# Altium PCB BEE-1012 PAY-IF V1.0.0.PcbDoc (part 7 of 7)
Units mm, origin at the board's own origin, x right, y up, seen from the top; angles counter-clockwise.
Board outline 93 x 90 mm, 6 copper layers (Top_1, GND_2, SIGNAL_3, PWR_4, GND_5, Bottom_6), stack 1.606 mm thick; 497 components, 371 nets, 2212 pads, 1215 vias.
Unrouted connection lines stored in the file: 56.
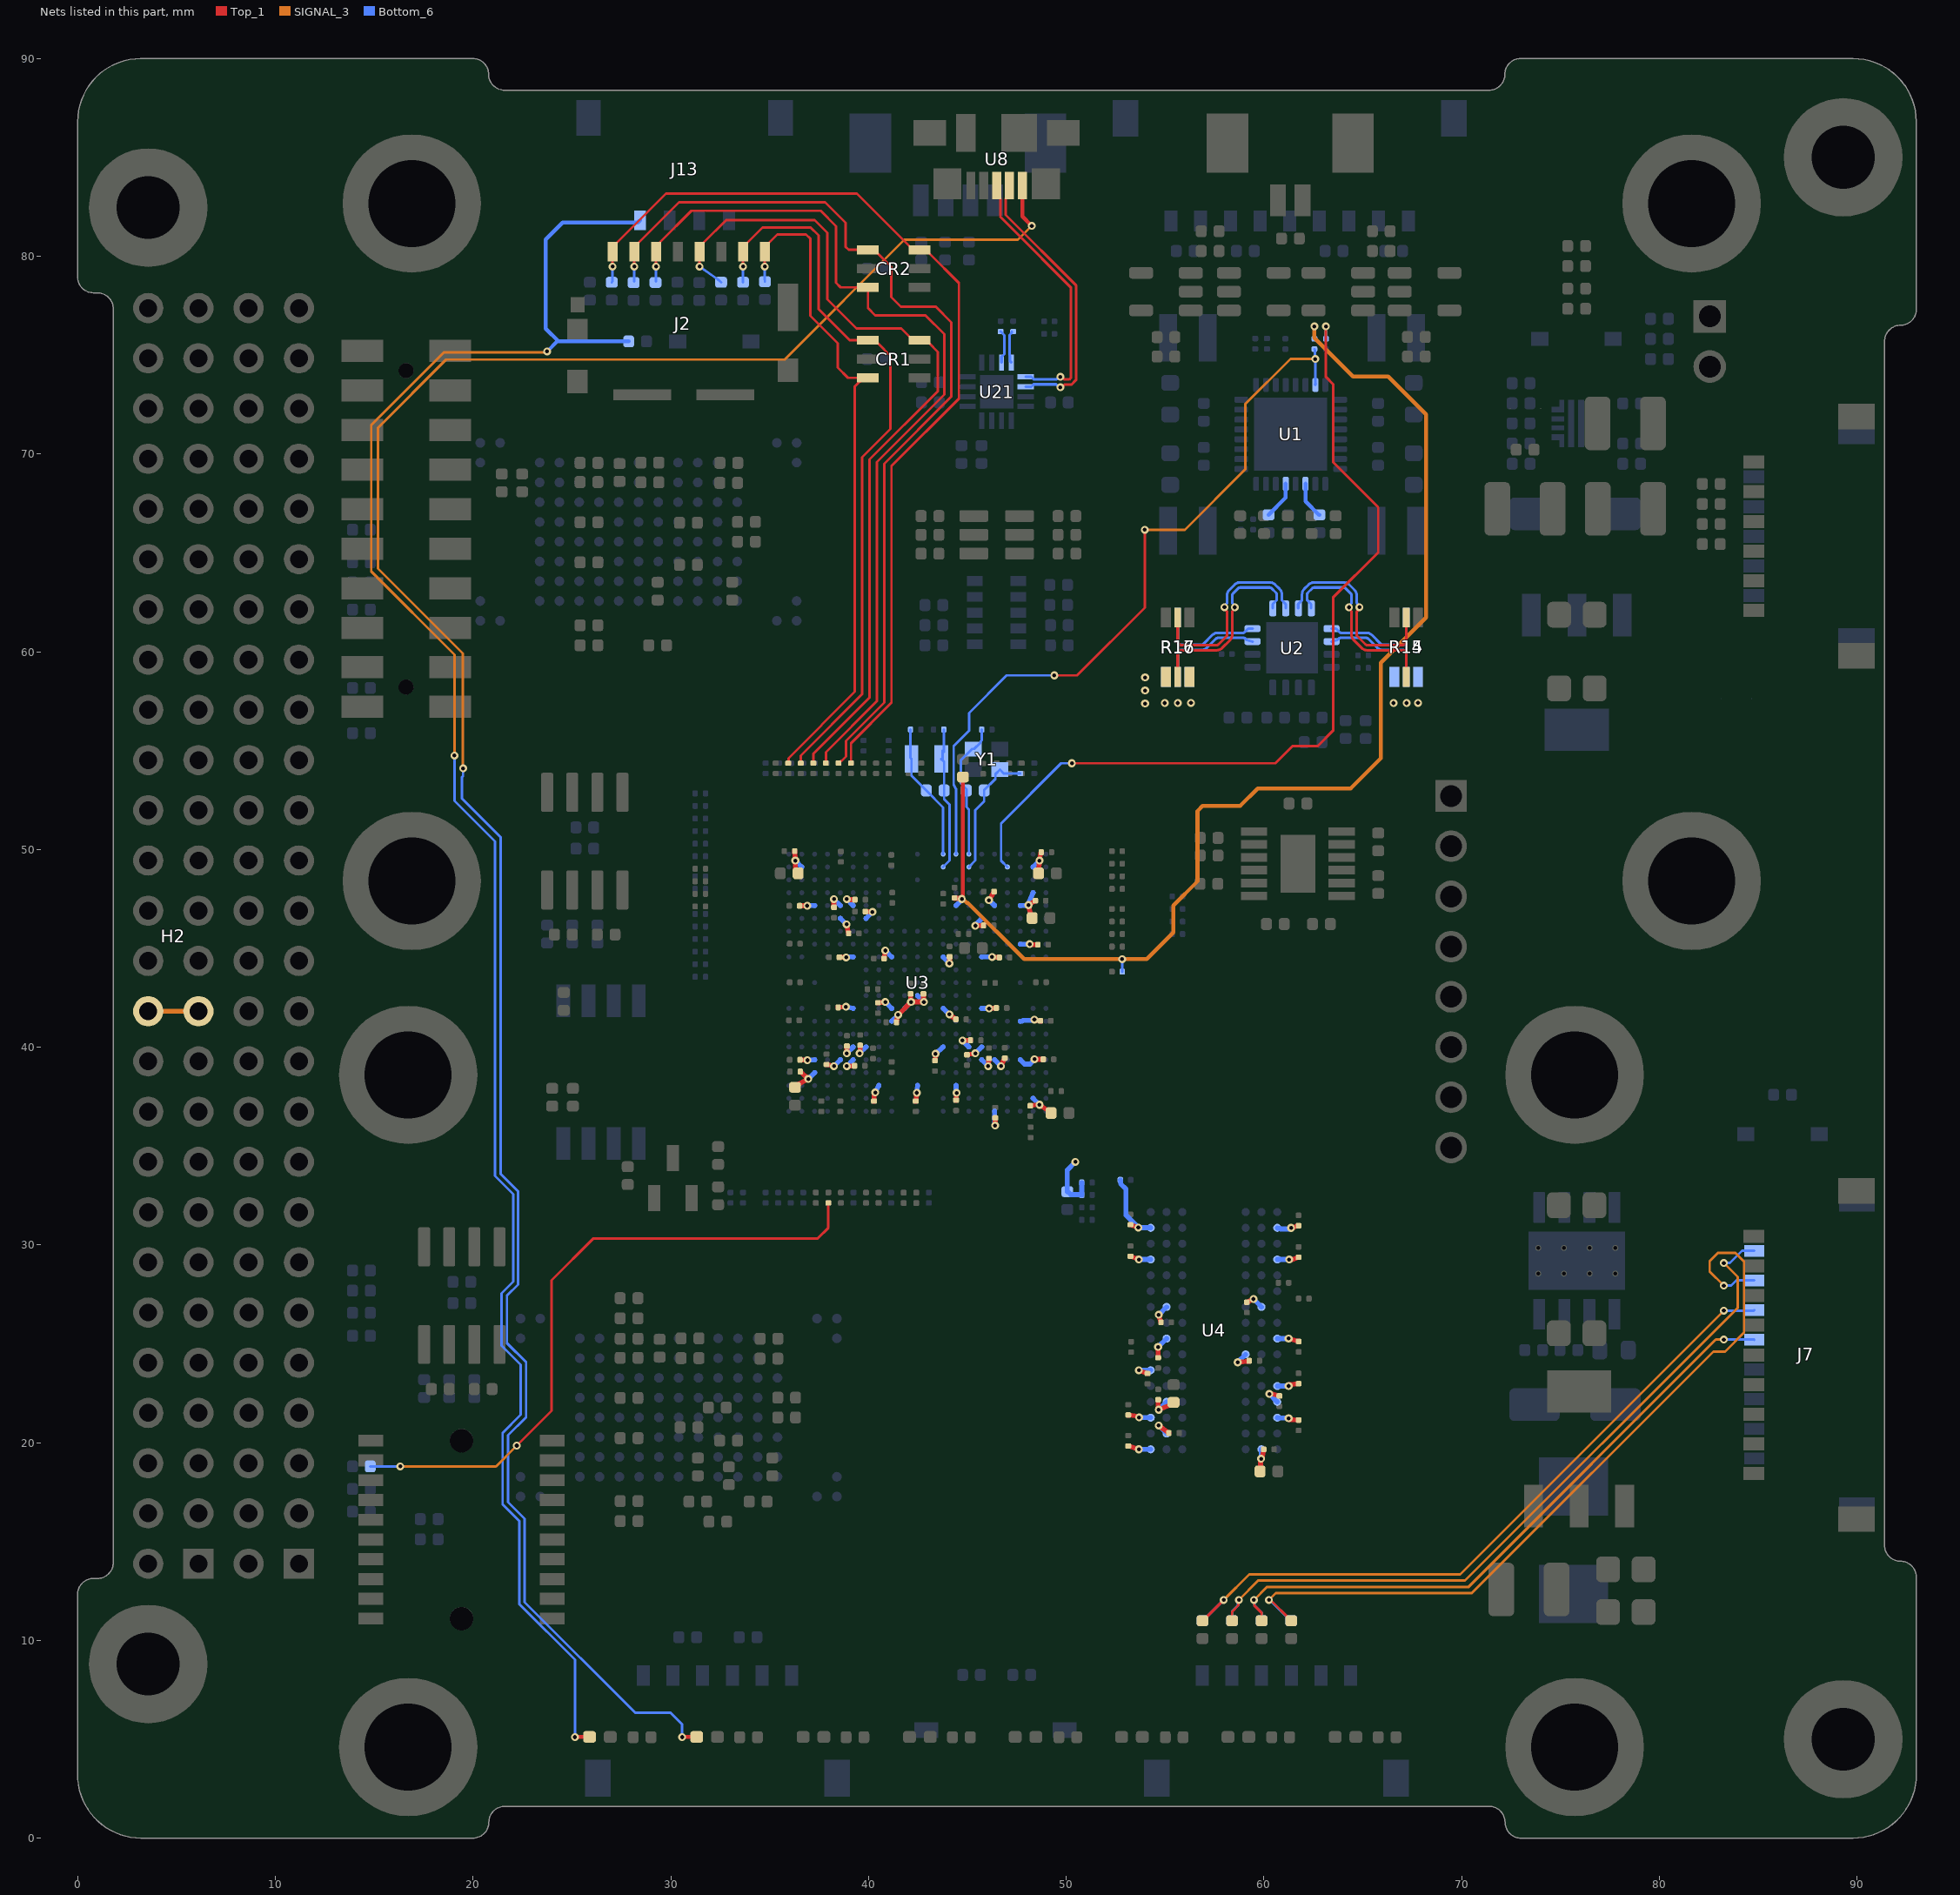
[diagram p10: the nets of this part, all layers, seen from the top]

## Via types
v1: diameter 0.4, hole 0.2, Top_1 to Bottom_6, tented both sides, 1215 vias

## Nets (pads, with @x,y where several pads share a name; then routed paths per layer and width w, separated by ;. In a path a pad name is that pad's centre, name@x,y a point inside that pad or via, vN(x,y) a via of type N, cw(c..) or ccw(c..) an arc to the next point about the centre after c; other vN are vias at no path point) (continued)
SDMMC2_CK: CR1.3 J2.P5 R107.2 R154.1 | length 43.1
  Top_1 w0.125: v1(31.457,79.478) J2.P5@31.457,80.226 31.648,80.417 31.648,80.676 32.801,81.828 37.283,81.828 37.924,81.188 37.924,77.82 39.394,76.35 41.656,76.35 42.253,75.753 CR1.3@42.577,75.753 42.743,75.587 43.084,75.587 43.504,75.167 43.504,73.168 40.055,69.719 40.055,57.683 37.211,54.839 R107.2@37.211,54.364
  Bottom_6 w0.125: v1(31.457,79.478) 32.386,78.819 R154.1@32.549,78.682
SDMMC2_CMD: CR2.6 J2.P3 R106.2 R155.1 | length 46.2
  Top_1 w0.125: v1(29.257,79.478) J2.P3@29.257,80.226 29.448,80.417 29.448,80.701 31.043,82.296 37.592,82.296 38.363,81.525 38.363,78.655 38.593,78.425 CR2.6@39.973,78.425 39.973,77.375 40.341,77.007 42.881,77.007 43.831,76.057 43.831,73 40.426,69.594 40.426,57.502 37.846,54.922 R106.2@37.846,54.364
  Bottom_6 w0.125: R155.1@29.257,78.724 v1(29.257,79.478)
SDMMC2_D0: CR1.4 J2.P7 R108.2 R150.1 | length 37
  Top_1 w0.125: v1(33.657,79.478) J2.P7@33.657,80.226 33.657,80.467 34.647,81.457 37.069,81.457 37.474,81.053 37.474,77.33 39.051,75.753 CR1.4@39.973,75.753 40.139,75.587 40.487,75.587 41.116,74.958 41.116,71.271 39.684,69.839 39.684,57.853 36.576,54.746 R108.2@36.576,54.364
  Bottom_6 w0.125: R150.1@33.655,78.682 33.657,78.819 v1(33.657,79.478)
SDMMC2_D1: CR1.6 J2.P8 R110.2 R151.1 | length 34.3
  Top_1 w0.125: v1(34.757,79.478) J2.P8@34.757,80.226 34.757,80.467 35.392,81.102 36.842,81.102 37.055,80.889 37.055,76.983 38.446,75.592 38.446,74.37 38.963,73.853 CR1.6@39.754,73.853 ; R110.2@35.941,54.364 35.955,54.379 35.955,54.612 39.313,57.97 39.313,73.412 CR1.6@39.754,73.853 ; CR1.6@39.973,73.853 39.884,73.853 CR1.6@39.754,73.853
  Bottom_6 w0.125: v1(34.757,79.478) 34.757,78.848 R151.1@34.762,78.711
SDMMC2_D2: CR2.3 J2.P1 R112.2 R152.1 | length 48.9
  Top_1 w0.125: v1(27.057,79.478) J2.P1@27.057,80.226 27.057,80.467 29.757,83.167 39.411,83.167 42.253,80.325 CR2.3@42.577,80.325 42.901,80.325 43.067,80.159 43.067,80.154 44.571,78.649 44.571,72.793 41.168,69.389 41.168,57.425 39.116,55.373 39.116,55.131 39.119,55.128 39.119,54.367 R112.2@39.116,54.364
  Bottom_6 w0.125: R152.1@27.015,78.682 27.057,78.724 v1(27.057,79.478)
SDMMC2_D3: CR2.4 J2.P2 R76.2 R153.1 | length 47.5
  Top_1 w0.125: v1(28.157,79.478) J2.P2@28.157,80.226 28.157,80.467 28.348,80.658 30.424,82.734 37.808,82.734 38.849,81.693 38.849,80.476 39,80.325 CR2.4@39.973,80.325 40.297,80.325 40.463,80.159 41.148,79.474 41.148,77.937 41.643,77.443 43.408,77.443 44.196,76.654 44.196,72.905 40.797,69.506 40.797,57.422 39.133,55.758 38.866,55.491 38.866,55.027 38.869,55.025 38.869,54.703 38.642,54.476 38.609,54.476 38.497,54.364 R76.2@38.481,54.364
  Bottom_6 w0.125: R153.1@28.157,78.724 v1(28.157,79.478)
SENSE1_N: R14.4 U2.12 | length 9.9
  Top_1 w0.134: v1(64.306,62.244) 64.42,62.056 cw(c64.305,61.986) 64.439,61.987 ; 64.439,61.987 cw(c64.305,61.986) 64.439,61.985 64.435,61.662 ccw(c64.696,61.658) 64.435,61.658 64.435,60.865 ccw(c64.83,60.865) 64.55,60.586 64.947,60.189 ccw(c65.226,60.469) 65.226,60.074 67.049,60.074 cw(c67.049,59.94) 67.143,60.035 67.159,60.02 cw(c67.064,59.925) 67.198,59.925 R14.4@67.198,58.724
  Bottom_6 w0.134: U2.12@62.387,62.192 62.387,62.409 62.192,62.603 62.192,62.896 cw(c62.326,62.896) 62.232,62.991 62.447,63.207 cw(c62.542,63.112) 62.542,63.246 64.038,63.246 cw(c64.038,63.112) 64.133,63.207 64.396,62.944 cw(c64.301,62.849) 64.435,62.849 ccw(c64.696,62.849) 64.435,62.847 64.437,62.504 ; v1(64.306,62.244) 64.418,62.434 ccw(c64.303,62.502) 64.437,62.503
SENSE1_P: R14.3 U2.11 | length 10.3
  Top_1 w0.134: 64.696,61.658 64.696,60.865 ccw(c64.83,60.865) 64.735,60.77 65.131,60.374 ccw(c65.226,60.469) 65.226,60.335 67.011,60.335 ccw(c67.011,60.469) 67.105,60.374 67.159,60.428 ccw(c67.064,60.522) 67.198,60.522 R14.3@67.198,61.724 ; 64.696,61.658 64.7,61.981 ccw(c64.305,61.986) 64.7,61.987 ccw(c64.439,61.987) 64.7,61.988 cw(c64.835,61.989) 64.719,62.057 v1(64.831,62.247)
  Bottom_6 w0.134: U2.11@61.737,62.192 61.737,62.409 61.931,62.603 61.931,62.896 cw(c62.326,62.896) 62.047,63.176 62.264,63.393 cw(c62.542,63.112) 62.542,63.507 64.038,63.507 cw(c64.038,63.112) 64.317,63.392 64.581,63.128 cw(c64.301,62.849) 64.696,62.849 64.698,62.504 ccw(c64.832,62.505) 64.717,62.436 v1(64.831,62.247)
SENSE2_N: R15.4 U2.14 | length 5.4
  Bottom_6 w0.134: U2.14@63.427,60.517 63.731,60.604 63.784,60.656 cw(c63.878,60.562) 63.878,60.696 65.182,60.696 cw(c65.182,60.562) 65.277,60.657 65.736,60.198 ccw(c66.014,60.478) 66.014,60.083 67.079,60.083 cw(c67.079,59.949) 67.213,59.949 R15.4@67.213,58.724
SENSE2_P: R15.3 U2.13 | length 5.4
  Bottom_6 w0.134: U2.13@63.427,61.167 63.644,61.167 63.815,60.996 ccw(c63.909,61.091) 63.909,60.957 65.182,60.957 cw(c65.182,60.562) 65.461,60.842 65.92,60.383 ccw(c66.014,60.478) 66.014,60.344 67.079,60.344 ccw(c67.079,60.478) 67.213,60.478 R15.3@67.213,61.724
SENSE3_N: R16.4 U2.7 | length 5.4
  Bottom_6 w0.134: R16.4@55.641,58.724 55.641,59.949 cw(c55.775,59.949) 55.775,60.083 56.839,60.083 ccw(c56.839,60.478) 57.117,60.198 57.577,60.657 cw(c57.671,60.562) 57.671,60.696 58.975,60.696 cw(c58.975,60.562) 59.07,60.656 59.122,60.604 U2.7@59.427,60.517
SENSE3_P: R16.3 U2.8 | length 5.4
  Bottom_6 w0.134: R16.3@55.641,61.724 55.641,60.478 ccw(c55.775,60.478) 55.775,60.344 56.839,60.344 ccw(c56.839,60.478) 56.933,60.383 57.392,60.842 cw(c57.671,60.562) 57.671,60.957 58.944,60.957 ccw(c58.944,61.091) 59.039,60.996 59.21,61.167 U2.8@59.427,61.167
SENSE4_N: R17.4 U2.9 | length 9.9
  Top_1 w0.134: R17.4@55.641,58.724 55.641,59.925 cw(c55.775,59.925) 55.68,60.02 55.695,60.035 cw(c55.79,59.94) 55.79,60.074 57.613,60.074 ccw(c57.613,60.469) 57.891,60.189 58.289,60.586 ccw(c58.008,60.865) 58.403,60.865 58.403,61.658 ccw(c58.142,61.658) 58.403,61.662 58.399,61.985 cw(c58.533,61.986) 58.399,61.987 ; 58.399,61.987 cw(c58.533,61.986) 58.418,62.056 v1(58.532,62.244)
  Bottom_6 w0.134: 58.402,62.503 ccw(c58.536,62.502) 58.42,62.434 v1(58.532,62.244) ; 58.402,62.504 58.403,62.847 ccw(c58.142,62.849) 58.403,62.849 cw(c58.538,62.849) 58.442,62.944 58.706,63.207 cw(c58.8,63.112) 58.8,63.246 60.296,63.246 cw(c60.296,63.112) 60.391,63.207 60.607,62.991 cw(c60.512,62.896) 60.646,62.896 60.646,62.603 60.452,62.409 U2.9@60.452,62.192
SENSE4_P: R17.3 U2.10 | length 10.3
  Top_1 w0.134: R17.3@55.641,61.724 55.641,60.522 ccw(c55.775,60.522) 55.68,60.428 55.733,60.374 ccw(c55.827,60.469) 55.827,60.335 57.613,60.335 ccw(c57.613,60.469) 57.707,60.374 58.103,60.77 ccw(c58.008,60.865) 58.142,60.865 58.142,61.658 ; v1(58.007,62.247) 58.119,62.057 cw(c58.004,61.989) 58.138,61.988 ccw(c58.399,61.987) 58.138,61.987 ccw(c58.533,61.986) 58.138,61.981 58.142,61.658
  Bottom_6 w0.134: v1(58.007,62.247) 58.121,62.436 ccw(c58.006,62.505) 58.14,62.504 58.142,62.849 cw(c58.538,62.849) 58.257,63.128 58.522,63.392 cw(c58.8,63.112) 58.8,63.507 60.296,63.507 cw(c60.296,63.112) 60.574,63.393 60.791,63.176 cw(c60.512,62.896) 60.907,62.896 60.907,62.603 61.102,62.409 U2.10@61.102,62.192
SHDN: R3.1 U3.B4 | length 44.2
  Top_1 w0.127: v1(50.292,54.356) 60.579,54.356 61.442,55.219 62.712,55.219 63.5,56.007 63.5,62.738 65.786,65.024 65.786,67.31 63.5,69.596 63.5,73.533 63.141,73.892 v1(63.141,76.454)
  Bottom_6 w0.125: U3.B4@47.028,49.112 46.708,49.432 46.708,51.315 49.748,54.356 v1(50.292,54.356)
  Bottom_6 w0.127: R3.1@63.141,75.827 v1(63.141,76.454)
SPI_CLK_EXP: J7.4 R221.1 R240.1 | length 33.2
  Top_1 w0.127: v1(59.496,12.044) 59.513,12.028 59.513,11.763 59.889,11.387 R221.1@59.889,10.991
  SIGNAL_3 w0.127: v1(59.496,12.044) 60.142,12.69 60.716,12.69 70.337,12.69 82.86,25.213 v1(83.264,25.213)
  Bottom_6 w0.125: v1@59.468,12.064 59.519,12.013 59.519,11.772 59.889,11.402 R240.1@59.889,10.991 ; v1(83.264,25.213) 84.797,25.213 J7.4@84.809,25.201
SPI_CS_EXP: J7.2 R220.1 R239.1 | length 41.6
  Top_1 w0.127: v1@60.259,12.083 60.294,12.083 R220.1@61.386,10.991
  SIGNAL_3 w0.127: v1@60.259,12.083 60.299,12.083 60.6,12.383 70.514,12.383 82.736,24.605 83.325,24.605 84.288,25.568 84.288,29.155 83.851,29.591 82.968,29.591 82.55,29.173 82.55,28.654 v1(83.264,27.94)
  Bottom_6 w0.125: v1@60.259,12.083 61.351,10.991 R239.1@61.386,10.991 ; v1(83.264,27.94) 83.636,27.94 83.903,28.207 J7.2@84.803,28.207
  other v1: 60.259,12.044
SPI_MISO_EXP: J7.3 R223.1 R243.1 | length 35.9
  Top_1 w0.127: R223.1@56.896,10.991 56.917,10.991 v1(57.971,12.044) v1@57.971,12.05
  SIGNAL_3 w0.127: v1@57.971,12.05 59.257,13.335 69.929,13.335 v1(83.264,26.67)
  Bottom_6 w0.125: R243.1@56.896,10.991 56.917,10.991 v1(57.971,12.044) v1@57.971,12.05 ; v1(83.264,26.67) 84.778,26.67 J7.3@84.809,26.701
SPI_MOSI_EXP: J7.1 R222.1 R242.1 | length 38.1
  Top_1 w0.125: R222.1@58.393,10.991 58.393,11.447 58.713,11.768 58.713,12.023 v1(58.734,12.044)
  SIGNAL_3 w0.127: v1(58.734,12.044) 59.714,13.024 70.174,13.024 83.962,26.812 83.962,28.385 v1(83.264,29.083)
  Bottom_6 w0.125: R242.1@58.393,10.991 58.393,11.471 58.681,11.76 58.681,11.992 v1(58.734,12.044) ; v1(83.264,29.083) 83.568,29.083 84.186,29.701 J7.1@84.809,29.701
STX_12V: H2.23 H2.24 | length 2.5
  SIGNAL_3 w0.25: H2.24@3.57,41.82 H2.23@6.11,41.82
STX_GPIO: R55.2 R215.2 | length 33.3
  Top_1 w0.134: v1(22.211,19.848) 23.967,21.605 23.967,28.206 26.09,30.328 37.437,30.328 37.973,30.864 R55.2@37.973,32.123
  SIGNAL_3 w0.134: v1(16.319,18.796) 21.159,18.796 v1(22.211,19.848)
  Bottom_6 w0.134: R215.2@14.801,18.796 v1(16.319,18.796)
SW_2_CONN_USB_N: R114.1 U21.11 | length 1.7
  Bottom_6 w0.134: R114.1@46.685,76.192 46.697,76.192 46.767,76.121 46.767,76.11 46.873,76.004 46.873,75.048 46.732,74.907 U21.11@46.732,74.622
SW_2_CONN_USB_P: R115.1 U21.12 | length 1.7
  Bottom_6 w0.134: U21.12@47.232,74.622 47.169,74.685 47.169,74.97 47.134,75.005 47.134,76.019 47.236,76.121 47.244,76.129 R115.1@47.244,76.192
USB_DEBUG_N: U8.2 U21.14 | length 14.2
  Top_1 w0.134: U8.2@47.132,83.577 47.132,83.119 46.938,82.925 46.938,82.094 50.496,78.536 50.496,73.734 50.265,73.503 49.908,73.503 49.781,73.376 v1(49.709,73.376)
  Bottom_6 w0.134: U21.14@47.952,73.402 48.237,73.402 48.356,73.521 49.493,73.521 49.638,73.376 v1(49.709,73.376)
USB_DEBUG_P: U8.3 U21.13 | length 13.8
  Top_1 w0.134: U8.3@46.482,83.577 46.482,83.119 46.676,82.925 46.676,81.986 47.313,81.349 50.235,78.427 50.235,73.843 50.157,73.764 49.919,73.764 49.781,73.901 v1(49.709,73.901)
  Bottom_6 w0.134: U21.13@47.952,73.902 48.237,73.902 48.356,73.783 49.519,73.783 49.638,73.901 v1(49.709,73.901)
VBUS: D1.2 U8.1 | length 115.2
  Top_1 w0.2: v1(30.572,5.109) 30.575,5.112 31.308,5.112 D1.2@31.311,5.115 ; U8.1@47.782,83.577 47.782,82.012 v1(48.26,81.534)
  SIGNAL_3 w0.125: v1(19.496,54.103) 19.477,54.121 19.477,59.911 15.189,64.2 15.189,71.323 18.638,74.772 35.758,74.772 41.814,80.829 47.555,80.829 v1(48.26,81.534)
  Bottom_6 w0.125: v1(19.496,54.103) v1(19.496,54.103) 19.494,53.715 19.431,53.653 19.431,52.578 21.394,50.615 21.394,33.589 22.278,32.705 22.278,27.993 21.717,27.432 21.717,25.032 22.683,24.066 22.683,21.286 21.775,20.378 21.775,16.985 22.612,16.147 22.612,11.935 28.206,6.341 29.987,6.341 30.572,5.756 v1(30.572,5.109)
VBUS/EN: D12.2 J13.1 R232.1 | length 98
  Top_1 w0.2: v1(25.152,5.109) 25.155,5.112 25.888,5.112 D12.2@25.891,5.116
  SIGNAL_3 w0.125: v1(19.058,54.75) 19.058,59.848 14.848,64.058 14.848,71.464 18.528,75.144 v1@23.749,75.144
  Bottom_6 w0.125: v1(19.058,54.75) 19.058,52.451 21.105,50.404 21.105,33.485 22.028,32.562 22.028,28.137 21.439,27.547 21.439,24.916 22.409,23.946 22.409,21.406 21.496,20.493 21.496,16.879 22.343,16.032 22.343,11.829 25.152,9.021 v1(25.152,5.109)
  Bottom_6 w0.2: v1(23.749,75.184) 24.257,75.692 24.323,75.692 ; R232.1@27.871,75.692 24.323,75.692 ; J13.1@28.446,81.814 28.344,81.712 24.536,81.712 23.678,80.853 23.678,76.338 24.323,75.692
VDDBU: C59.2 R6.2 R21.2 R28.2 U3.E8 | length 64.1
  Top_1 w0.134: v1@44.704,47.517 v1(44.726,47.495)
  Top_1 w0.2: R28.2@44.704,53.652 44.778,53.578 44.778,47.601 44.726,47.549 v1(44.726,47.495)
  Top_1 w0.25: C59.2@44.33,47.543 44.349,47.523 44.698,47.523 v1@44.704,47.517
  SIGNAL_3 w0.2: v1(44.726,47.495) 44.781,47.495 44.981,47.294 45.026,47.294 47.87,44.45 49.628,44.45 v1(52.832,44.45) 54.075,44.45 55.419,45.794 55.419,47.164 56.642,48.387 56.642,51.943 56.896,52.197 58.801,52.197 59.69,53.086 64.389,53.086 65.913,54.61 65.913,59.436 68.199,61.722 68.199,72.009 66.294,73.914 64.516,73.914 62.556,75.874 v1(62.556,76.454)
  Bottom_6 w0.125: v1(52.832,44.45) 52.836,44.446 52.836,43.819 R21.2@52.84,43.815
  Bottom_6 w0.127: R6.2@62.556,75.827 v1(62.556,76.454)
  Bottom_6 w0.25: U3.E8@44.428,47.162 44.726,47.46 v1(44.726,47.495)
VDDCORE: C24.2 C25.2 C26.2 C27.2 C28.2 C30.2 C31.2 C32.2 C33.2 C34.2 C35.2 C36.2 C37.2 C38.2 C39.2 C40.2 R16.2 U3.B2 U3.F6 U3.F15 U3.H3 U3.J9 U3.J13 U3.J16 U3.N13 U3.N16 U3.T15 U3.U16 U3.U17 U3.U19 U3.V19 | length 13.2
  Top_1 w0.25: C40.2@36.288,37.968 36.311,38.043 v1(36.953,38.387) C28.2@36.562,38.767 ; C32.2@36.54,39.362 36.549,39.352 36.899,39.352 v1(36.909,39.343) ; C37.2@37.884,39.116 38.236,39.061 v1(38.253,39.037) ; C27.2@38.468,42.008 v1(38.862,42.042) ; C25.2@38.527,44.548 v1@38.861,44.548 ; v1(38.903,39.037) 38.917,39.051 39.286,39.051 C31.2@39.293,39.058 ; v1(39.553,39.687) 39.579,39.713 39.579,40.094 C30.2@39.581,40.095 ; C36.2@39.85,46.851 v1@40.189,46.851 ; C26.2@40.494,42.236 v1@40.848,42.291 ; C33.2@40.791,44.482 v1(40.853,44.887) ; v1(44.092,44.235) 44.099,44.242 44.099,44.563 C39.2@44.103,44.567 ; v1(45.403,46.139) 45.412,46.149 45.809,46.149 C38.2@45.818,46.158 ; v1(48.153,45.212) 48.194,45.212 48.223,45.183 C35.2@48.568,45.183 ; C24.2@48.581,48.783 48.581,48.786 48.578,48.789 v1(48.653,49.437) C34.2@48.716,49.837
  Bottom_6 w0.25: v1(36.909,39.343) U3.U19@37.278,39.362 ; v1(36.953,38.387) U3.V19@37.278,38.712 ; v1(38.253,39.037) U3.U17@38.578,39.362 ; v1(38.862,42.042) U3.N16@39.228,41.962 ; v1(38.872,44.537) 38.897,44.562 U3.J16@39.228,44.562 ; v1(38.903,39.037) U3.U16@39.228,39.362 ; v1(39.553,39.687) U3.T15@39.878,40.012 ; U3.F15@39.878,46.512 v1(40.203,46.837) ; v1(40.853,42.287) U3.N13@41.178,41.962 ; v1(40.853,44.887) U3.J13@41.178,44.562 ; U3.J9@43.778,44.562 43.778,44.551 44.044,44.285 44.044,44.282 v1(44.092,44.235) ; v1(45.403,46.139) 45.403,46.18 45.728,46.505 U3.F6@45.728,46.512 ; U3.H3@47.678,45.212 v1(48.153,45.212) ; U3.B2@48.328,49.112 v1(48.653,49.437)
  other v1: 54.991,57.404 55.651,57.404 56.312,57.412
VDDCPU: C18.2 C19.2 C20.2 C21.2 C22.2 C23.2 R17.2 U3.B20 U3.E16 U3.E17 U3.E19 U3.F17 | length 5
  Top_1 w0.25: C23.2@36.268,49.909 v1(36.303,49.437) 36.305,48.952 C18.2@36.443,48.789 ; C21.2@36.518,47.147 36.521,47.149 36.9,47.149 v1(36.903,47.152) ; C22.2@38.253,47.099 v1(38.253,47.487) ; v1(38.892,46.207) C20.2@38.993,45.758 ; v1(38.903,47.487) 38.944,47.487 38.973,47.458 C19.2@39.318,47.458
  Bottom_6 w0.25: v1(36.303,49.437) U3.B20@36.628,49.112 ; v1(36.903,47.152) 36.913,47.162 U3.E19@37.278,47.162 ; v1(38.253,47.487) U3.E17@38.578,47.162 ; U3.F17@38.578,46.512 38.583,46.512 38.887,46.207 v1(38.892,46.207) ; v1(38.903,47.487) U3.E16@39.228,47.162
  other v1: 53.993,57.381 53.993,58.041 53.993,58.702
VDDIODDR: C64.1 C65.1 C66.1 C67.1 C68.1 C69.1 C70.1 C71.1 C72.1 C73.1 C74.1 C75.1 C76.1 C77.1 C78.1 C79.1 C80.1 C82.1 C83.1 C84.1 C85.2 C86.2 C87.2 C88.2 C89.2 C90.2 C91.2 C92.2 C93.2 C94.2 C95.2 C96.2 C97.2 C98.2 C99.2 C100.2 C101.2 C102.2 R15.2 R127.2 R129.2 U3.AA5 U3.M11 U3.N6 U3.N9 U3.N12 U3.P3 U3.P13 U3.T6 U3.T7 U3.T9 U3.U3 U3.U5 U3.U6 U3.W8 U3.Y2 U4.A1 U4.A8 U4.B2 U4.C1 U4.C9 U4.D2 U4.D9 U4.E9 U4.F1 U4.G7 U4.H2 U4.H9 U4.K2 U4.K8 U4.N1 U4.N9 U4.R1 U4.R9 | length 42.8
  Top_1 w0.25: C94.2@41.418,41.258 41.474,41.616 v1(41.503,41.637) v1(42.153,42.287) v1(42.803,42.287) ; v1@42.138,42.302 C92.2@42.138,42.688 ; v1@42.785,42.305 C95.2@42.785,42.691 ; C87.2@43.388,39.333 v1(43.396,39.668) ; v1(44.095,41.655) 44.406,41.433 C96.2@44.418,41.408 ; C90.2@44.431,37.32 44.433,37.32 44.446,37.333 44.446,37.672 v1(44.461,37.687) ; v1@44.764,40.348 C98.2@45.16,40.348 ; C86.2@44.981,39.617 v1@45.392,39.681 ; v1(46.053,39.037) C85.2@46.103,39.425 ; v1(46.103,41.956) 46.116,41.97 46.456,41.97 C93.2@46.468,41.982 ; v1(46.406,36.037) 46.41,36.041 46.41,36.418 C91.2@46.414,36.422 ; v1(46.703,39.037) 46.885,39.433 C88.2@46.898,39.445 ; C89.2@48.186,37.039 48.63,37.104 v1(48.653,37.087) C100.2@49.228,36.687 ; v1(48.391,41.39) 48.42,41.361 48.666,41.361 C99.2@48.716,41.312 ; v1(48.394,39.393) 48.4,39.388 48.838,39.388 C97.2@48.843,39.383 ; C67.1@53.139,19.832 v1@53.66,19.653 ; C68.1@53.142,21.392 53.641,21.338 v1(53.69,21.277) ; C75.1@53.256,29.42 v1@53.67,29.278 ; C74.1@53.256,31.02 v1(53.65,30.879) ; v1@53.684,23.649 C77.1@54.111,23.502 ; C66.1@54.65,24.301 54.654,24.304 54.654,24.833 v1(54.651,24.835) ; C72.1@54.656,22.17 54.656,21.684 v1(54.678,21.662) C64.1@55.439,21.985 ; v1@54.669,26.444 C76.1@54.793,26.083 ; v1@54.683,20.863 C79.1@55.193,20.483 ; C64.1@55.431,22.033 55.431,22.015 C64.1@55.439,22.007 ; v1(58.678,24.062) 59.246,24.114 C69.1@59.259,24.139 ; C80.1@59.142,27.101 v1(59.478,27.262) ; C84.1@59.806,18.545 59.854,18.708 59.843,18.708 59.832,18.719 59.832,19.161 v1(59.857,19.187) ; v1@59.854,19.183 59.916,19.227 C73.1@59.993,19.658 ; v1(60.278,22.462) 60.316,22.483 60.356,22.483 60.702,22.386 C78.1@60.784,22.363 ; v1(61.251,21.233) 61.311,21.165 C82.1@61.756,21.139 ; v1(61.251,22.862) 61.302,22.927 C70.1@61.756,22.982 ; v1(61.251,25.262) 61.736,25.128 C83.1@61.761,25.115 ; v1(61.278,29.262) ccw(c61.359,29.498) 61.442,29.262 61.731,29.362 C71.1@61.756,29.37 ; v1(61.378,30.862) ccw(c61.397,31.111) 61.479,30.875 61.731,30.962 C65.1@61.756,30.97
  Bottom_6 w0.25: U3.P13@41.178,41.312 v1(41.503,41.637) ; U3.N12@41.828,41.962 v1(42.153,42.287) ; U3.M11@42.478,42.612 v1(42.803,42.287) ; v1(43.396,39.668) U3.T9@43.778,40.012 ; U3.N9@43.778,41.962 43.783,41.962 44.09,41.655 v1(44.095,41.655) ; U3.W8@44.428,38.062 44.432,38.058 44.432,37.716 v1(44.461,37.687) ; v1(44.753,40.337) U3.T7@45.078,40.012 ; v1(45.403,39.687) U3.T6@45.728,40.012 ; U3.U6@45.728,39.362 v1(46.053,39.037) ; U3.N6@45.728,41.962 46.097,41.962 v1(46.103,41.956) ; U3.AA5@46.378,36.762 46.378,36.065 v1(46.406,36.037) ; U3.U5@46.378,39.362 v1(46.703,39.037) ; U3.U3@47.678,39.362 47.895,39.145 48.173,39.145 48.394,39.366 v1(48.394,39.393) ; U3.P3@47.678,41.312 47.777,41.312 47.826,41.361 48.363,41.361 v1(48.391,41.39) ; U3.Y2@48.328,37.412 v1(48.653,37.087) ; v1(50.464,34.196) 50.464,34.193 50.059,33.788 C102.2@50.059,32.689 50.091,32.689 50.234,32.545 50.777,32.545 50.789,32.533 C101.2@50.789,32.524 R129.2@50.789,33.154 ; R127.2@52.74,33.285 52.752,33.273 52.752,33.091 53.028,32.816 53.028,31.501 v1(53.65,30.879) 53.659,30.87 54.27,30.87 U4.R1@54.278,30.862 ; v1(53.678,19.662) U4.A1@54.278,19.662 ; v1@53.678,21.262 U4.C1@54.278,21.262 ; v1(53.678,23.662) U4.F1@54.278,23.662 ; v1(53.678,29.262) U4.N1@54.278,29.262 ; v1(54.651,24.835) U4.H2@55.078,25.262 ; v1(54.678,20.862) U4.B2@55.078,20.462 ; v1(54.678,21.662) U4.D2@55.078,22.062 ; v1(54.678,26.462) U4.K2@55.078,26.862 ; v1(58.678,24.062) U4.G7@59.078,24.462 ; v1(59.478,27.262) U4.K8@59.878,26.862 ; v1(59.857,19.187) 59.868,19.197 59.868,19.652 U4.A8@59.878,19.662 ; v1(60.278,22.462) U4.D9@60.678,22.062 ; U4.C9@60.678,21.262 60.693,21.247 61.198,21.247 v1@61.213,21.233 ; U4.E9@60.678,22.862 v1@61.103,22.862 ; U4.H9@60.678,25.262 v1@61.103,25.262 ; U4.N9@60.678,29.262 v1(61.278,29.262) ; U4.R9@60.678,30.862 60.708,30.832 60.819,30.832 60.845,30.805 61.281,30.805 61.337,30.862 v1(61.378,30.862)
  other v1: 66.563,57.404 67.223,57.404 67.798,57.412
VDDOUT25: C52.2 C53.2 C54.2 C55.2 C56.2 C57.2 C58.2 U3.D2 U3.E3 U3.E5 U3.J6 U3.T16 U3.W11 U3.W14 | length 6.5
  Top_1 w0.25: v1(38.903,39.687) 38.908,39.692 38.908,40.051 C58.2@38.912,40.055 ; C53.2@40.278,37.27 40.282,37.274 40.282,37.61 40.342,37.67 v1(40.342,37.711) ; C56.2@42.389,37.27 42.414,37.283 42.428,37.692 v1(42.443,37.692) ; v1(46.093,47.43) 46.344,47.843 C54.2@46.356,47.868 ; v1(46.253,44.562) 46.268,44.547 46.606,44.547 C57.2@46.618,44.533 C57.2@46.618,44.533 ; v1@48.064,47.169 C55.2@48.416,47.387 ; v1@48.075,47.151 C52.2@48.281,46.533
  Bottom_6 w0.25: v1(38.903,39.687) U3.T16@39.228,40.012 ; v1(40.342,37.711) 40.515,38.037 U3.W14@40.528,38.062 ; v1(42.443,37.692) U3.W11@42.478,38.062 ; U3.J6@45.728,44.562 v1(46.253,44.562) ; v1(46.093,47.43) 46.11,47.43 U3.E5@46.378,47.162 ; U3.E3@47.678,47.162 48.068,47.162 v1(48.093,47.187) ; v1@48.053,47.162 U3.D2@48.328,47.812
VLDO1: C16.2 U1.19 | length 1.9
  Bottom_6 w0.2: U1.19@62.106,68.493 62.106,67.599 62.783,66.922 C16.2@62.811,66.922
VLDO2: C17.2 U1.21 | length 1.9
  Bottom_6 w0.2: C17.2@60.238,66.922 61.106,67.79 U1.21@61.106,68.493
WKUP: R6.1 U1.7 U3.A8 | length 38.5
  Top_1 w0.125: v1(49.403,58.801) 50.546,58.801 53.975,62.23 v1(53.975,66.167)
  SIGNAL_3 w0.127: v1(53.975,66.167) 56.007,66.167 59.055,69.215 59.055,72.517 61.344,74.807 62.205,74.807 62.208,74.803 v1(62.599,74.803)
  Bottom_6 w0.125: U3.A8@44.428,49.762 44.428,53.07 44.314,53.265 44.314,55.234 45.085,56.005 45.085,56.896 46.99,58.801 v1(49.403,58.801)
  Bottom_6 w0.127: R6.1@62.556,75.303 62.581,75.277 62.577,75.274 62.577,74.825 62.602,74.8 62.602,73.576 62.62,73.558 62.581,73.518 U1.7@62.606,73.493
XIN24M: C60.1 R29.2 U3.B7 Y1.1 | length 6.7
  Bottom_6 w0.125: U3.B7@45.078,49.112 45.403,49.437 45.403,51.979 45.853,52.429 45.853,52.997 46.421,53.565 46.421,53.805 Y1.1@46.648,54.032 46.84,53.84 C60.1@47.676,53.84
XIN32K: C62.1 R30.2 U3.A9 Y2.1 | length 7
  Bottom_6 w0.125: C62.1@42.126,56.062 42.126,54.63 Y2.1@42.176,54.58 42.176,53.733 R30.2@42.926,52.983 43.778,52.131 U3.A9@43.778,49.762
XOUT24M: C61.1 R29.1 U3.A7 Y1.3 | length 7
  Bottom_6 w0.125: U3.A7@45.078,49.762 45.078,52.02 44.953,52.145 44.953,53.056 44.677,53.332 44.677,54.511 45.248,55.082 Y1.3@45.298,55.082 45.348,55.082 45.673,55.407 45.673,55.457 45.728,55.512 C61.1@45.728,56.062
XOUT32K: C63.1 R30.1 U3.B9 Y2.2 | length 7.5
  Bottom_6 w0.125: Y2.2@43.676,54.58 43.826,54.43 R30.1@43.826,52.983 43.826,52.542 44.103,52.265 44.103,49.437 U3.B9@43.778,49.112 ; Y2.2@43.751,54.505 43.751,54.995 43.813,54.932 C63.1@43.813,56.062
pads on no net: CR1.1 CR2.1 H1.02 H1.04 H1.05 H1.07 H1.08 H1.10 H1.12 H1.16 H1.17 H1.18 H1.19 H1.20 H1.22 H1.24 H1.26 H1.28 H1.29 H1.30 H1.31 H1.32 H1.33 H1.34 H1.35 H1.36 H1.40 H1.42 H1.47 H1.48 H1.49 H1.50 H1.51 H1.52 H2.01 H2.02 H2.03 H2.04 H2.05 H2.06 H2.07 H2.08 H2.09 H2.10 H2.11 H2.12 H2.13 H2.14 H2.15 H2.16 H2.17 H2.18 H2.19 H2.20 H2.21 H2.22 H2.33 H2.34 H2.35 H2.36 H2.37 H2.38 H2.39 H2.40 H2.41 H2.42 H2.43 H2.44 H2.49 H2.50 H2.51 H2.52 J1.1 J2.14 J2.15 J4.3 J8.2 J12. J12.09 J12.10 J12.11 J12.12 J12.13 J12.14 J12.15 J12.16 J14. J14.1 J14.3 J14.4 J14.5 J14.6 J14.7 J14.8 J14.9 J14.17 J14.20 J15.4 J16.2 U1.17 U3.A2 U3.A4 U3.A18 U3.A19 U3.AA15 U3.AA16 U3.AA18 U3.AA19 U3.B1 U3.B19 U3.C3 U3.C5 U3.C6 U3.C8 U3.C18 U3.C19 U3.C21 U3.D1 U3.D5 U3.D6 U3.D8 U3.D19 U3.D20 U3.E6 U3.F3 U3.F7 U3.F8 U3.F19 U3.F20 U3.G3 U3.G4 U3.G12 U3.G18 U3.G19 U3.G20 U3.H4 U3.H6 U3.H7 U3.H12 U3.H15 U3.H17 U3.H18 U3.J1 U3.J2 U3.J7 U3.J8 U3.J14 U3.J15 U3.J20 U3.K8 U3.K9 U3.K10 U3.K12 U3.L14 U3.M10 U3.M12 U3.M14 U3.N11 U3.N15 U3.N20 U3.N21 U3.P11 U3.R10 U3.R20 U3.R21 U3.T20 U3.T21 U3.V15 U3.V20 U3.V21 U3.W15 U3.W18 U3.W20 U3.W21 U3.Y13 U3.Y15 U3.Y18 U3.Y19 U3.Y20 U3.Y21 U4.J1 U4.J9 U4.L1 U4.L9 U5.A1 U5.A2 U5.A9 U5.A10 U5.B1 U5.B10 U5.D2 U5.D3 U5.D4 U5.D5 U5.D6 U5.D7 U5.D8 U5.D9 U5.E2 U5.E3 U5.E4@26.4,23.273 U5.E5 U5.E6 U5.E7 U5.E8 U5.E9 U5.F2@27.4,25.273 U5.F3@27.4,24.273 U5.F4@27.4,23.273 U5.F5@27.4,22.273 U5.F6@27.4,21.273 U5.F7@27.4,20.273 U5.F8@27.4,19.273 U5.F9@27.4,18.273 U5.G2@28.4,25.273 U5.G3@28.4,24.273 U5.G4@28.4,23.273 U5.G5@28.4,22.273 U5.G6@28.4,21.273 U5.G7@28.4,20.273 U5.G8@28.4,19.273 U5.G9@28.4,18.273 U5.H2@29.4,25.273 U5.H3@29.4,24.273 U5.H4 U5.H5 U5.H6 U5.H7 U5.H8@29.4,19.273 U5.H9@29.4,18.273 U5.J2 U5.J3 U5.J4 U5.J5@30.4,22.273 U5.J6 U5.J7 U5.J8 U5.J9 U5.K2@31.4,25.273 U5.K3@31.4,24.273 U5.K4 U5.K5@31.4,22.273 U5.K6 U5.K7 U5.K8@31.4,19.273 U5.K9@31.4,18.273 U5.L2@32.4,25.273 U5.L3@32.4,24.273 U5.L4@32.4,23.273 U5.L5 U5.L6 U5.L7@32.4,20.273 U5.L8@32.4,19.273 U5.L9@32.4,18.273 U5.M2 U5.M3 U5.M4@33.4,23.273 U5.M5@33.4,22.273 U5.M6 U5.M7@33.4,20.273 U5.M8 U5.M9 U5.N2@34.4,25.273 U5.N3@34.4,24.273 U5.N4 U5.N5 U5.N6 U5.N7 U5.N8@34.4,19.273 U5.N9@34.4,18.273 U5.P2@35.4,25.273 U5.P3@35.4,24.273 U5.P4 U5.P5@35.4,22.273 U5.P6@35.4,21.273 U5.P7 U5.P8@35.4,19.273 U5.P9@35.4,18.273 U5.T1 U5.T10 U5.U1 U5.U2 U5.U9 U5.U10 U6.A1 U6.A2 U6.A9 U6.A10 U6.B1 U6.B10 U6.D2 U6.D3 U6.D4 U6.D5 U6.D6 U6.D7 U6.D8 U6.D9 U6.E2 U6.E3 U6.E4@24.368,67.564 U6.E5 U6.E6 U6.E7 U6.E8 U6.E9 U6.F2@25.368,69.564 U6.F3@25.368,68.564 U6.F4@25.368,67.564 U6.F5@25.368,66.564 U6.F6@25.368,65.564 U6.F7@25.368,64.564 U6.F8@25.368,63.564 U6.F9@25.368,62.564 U6.G2@26.368,69.564 U6.G3@26.368,68.564 U6.G4@26.368,67.564 U6.G5@26.368,66.564 U6.G6@26.368,65.564 U6.G7@26.368,64.564 U6.G8@26.368,63.564 U6.G9@26.368,62.564 U6.H2@27.368,69.564 U6.H3@27.368,68.564 U6.H4 U6.H5 U6.H6 U6.H7 U6.H8@27.368,63.564 U6.H9@27.368,62.564 U6.J2 U6.J3 U6.J4 U6.J5@28.368,66.564 U6.J6 U6.J7 U6.J8 U6.J9 U6.K2@29.368,69.564 U6.K3@29.368,68.564 U6.K4 U6.K5 U6.K6 U6.K7 U6.K8 U6.K9 U6.L2@30.368,69.564 U6.L3@30.368,68.564 U6.L4@30.368,67.564 U6.L5 U6.L6 U6.L7@30.368,64.564 U6.L8@30.368,63.564 U6.L9@30.368,62.564 U6.M2 U6.M3 U6.M4@31.368,67.564 U6.M5@31.368,66.564 U6.M6 U6.M7@31.368,64.564 U6.M8 U6.M9 U6.N2@32.368,69.564 U6.N3@32.368,68.564 U6.N4 U6.N5 U6.N6 U6.N7 U6.N8 U6.N9 U6.P2@33.368,69.564 U6.P3@33.368,68.564 U6.P4 U6.P5@33.368,66.564 U6.P6@33.368,65.564 U6.P7 U6.P8@33.368,63.564 U6.P9@33.368,62.564 U6.T1 U6.T10 U6.U1 U6.U2 U6.U9 U6.U10 U8.4 U12.8 U12.10 U21.7 U21.8 U21.9 U21.10 U21.16 U23.2 U23.3 U23.5
copper on no net: | length 0.7
  Top_1 w0.4: 35.406,68.564 35.431,68.589 v1(35.431,69.252)

## Polygon pours and split planes (outlines as drawn)
VDDCPU on Top_1 "VDDCPU_L01_P055" (solid, pour order 55): 56.484,59.234 56.484,58.826 56.705,58.826 cw(c56.705,58.723) 56.808,58.723 56.805,57.02 cw(c56.683,57.021) 56.683,56.899 53.958,56.899 cw(c53.958,57.119) 53.739,57.119 53.739,59.048 cw(c53.927,59.048) 53.927,59.236
12V_CONN on Top_1 "NONET_L04_P-001" (solid, pour order 71): 83.693,22.312 87.503,22.312 87.503,17.526 83.693,17.526
DCDC1 on Top_1 "Top_1-DCDC1" (solid, pour order 61): 69.465,73.203 68.282,73.203 ccw(c68.282,72.982) 68.061,72.982 68.061,63.653 68.048,61.224 67.555,61.224 67.555,62.616 ccw(c67.484,62.616) 67.484,62.687 66.916,62.687 ccw(c66.916,62.626) 66.855,62.626 66.855,61.224 66.355,61.224 66.366,61.235 66.367,63.511 cw(c66.508,63.511) 66.508,63.653 66.831,63.653 ccw(c66.831,63.786) 66.964,63.786 66.964,74.036 cw(c67.325,74.036) 67.325,74.397 68.584,74.397 69.001,74.397 ccw(c69.001,74.529) 69.133,74.528 69.142,76.214 ccw(c69.029,76.214) 69.029,76.327 68.563,76.327 cw(c68.563,76.442) 68.448,76.442 68.448,76.74 cw(c68.563,76.74) 68.563,76.855 69.507,76.855 cw(c69.507,76.637) 69.726,76.637 69.726,74.397 69.727,74.397 69.727,73.465 cw(c69.465,73.465)
DCDC4 on Top_1 "Top_1-DCDC4" (solid, pour order 57): 53.373,73.203 54.557,73.203 cw(c54.557,72.982) 54.777,72.982 54.777,63.653 54.791,61.224 55.284,61.224 55.284,62.616 cw(c55.355,62.616) 55.355,62.687 55.922,62.687 cw(c55.922,62.626) 55.984,62.626 55.984,61.224 56.484,61.224 56.472,61.235 56.472,63.511 ccw(c56.33,63.511) 56.33,63.653 56.008,63.653 cw(c56.007,63.786) 55.874,63.786 55.874,74.036 ccw(c55.513,74.036) 55.513,74.397 54.254,74.397 53.838,74.397 cw(c53.838,74.529) 53.705,74.528 53.696,76.214 cw(c53.809,76.214) 53.809,76.327 54.276,76.327 ccw(c54.276,76.442) 54.39,76.442 54.39,76.74 ccw(c54.275,76.74) 54.275,76.855 53.331,76.855 ccw(c53.331,76.637) 53.113,76.637 53.113,74.397 53.111,74.397 53.111,73.465 ccw(c53.373,73.465)
3V3 on Top_1 "3V3_L01_P054" (solid, pour order 54): 66.354,59.234 66.354,58.826 66.133,58.826 ccw(c66.133,58.723) 66.031,58.723 66.034,57.02 ccw(c66.156,57.021) 66.156,56.899 68.88,56.899 ccw(c68.88,57.119) 69.1,57.119 69.1,59.048 ccw(c68.911,59.048) 68.911,59.236
5V on Top_1 "NONET_L04_P-001" (solid, pour order 6): 73.533,14.326 73.533,11.187 ccw(c74.103,11.187) 74.103,10.617 77.648,10.617 77.648,14.8 74.007,14.8 ccw(c74.007,14.326)
12V on Top_1 "NONET_L04_P-001" (solid, pour order 5): 73.243,69.14 77.866,69.14 cw(c77.866,68.901) 78.105,68.901 78.105,65.61 cw(c77.823,65.61) 77.823,65.328 73.226,65.328 cw(c73.226,65.64) 72.914,65.64 72.914,68.811 cw(c73.243,68.811)
12V_CONN on Top_1 "12V_CONN_L01_P001" (solid, pour order 1): 78.092,74.059 78.092,69.515 cw(c77.835,69.515) 77.835,69.258 74.803,69.258 74.803,70.064 73.607,70.064 73.607,74.046 cw(c73.983,74.046) 73.983,74.422 77.729,74.422 cw(c77.729,74.059)
12V on Top_1 "12V_L01_P002" (solid, pour order 2): 72.812,71.39 72.812,73.611 ccw(c72.532,73.611) 72.532,73.892 70.878,73.892 ccw(c70.878,73.595) 70.582,73.595 70.582,71.339 ccw(c70.81,71.339) 70.81,71.112 72.534,71.112 ccw(c72.534,71.39)
VDDCORE on Bottom_6 "L6 BOT-VDD_3V3" (solid, pour order 33): 56.368,56.998 55.275,56.998 ccw(c55.274,56.956) 55.274,56.998 54.951,56.998 cw(c54.951,57.139) 54.81,57.139 54.809,59.224 55.298,59.224 55.298,58.025 ccw(c55.359,58.025) 55.359,57.963 55.927,57.963 ccw(c55.927,58.034) 55.998,58.034 55.998,59.224 56.492,59.224 56.504,57.134 cw(c56.368,57.133)
12V_CONN on Bottom_6 "NONET_L04_P-001" (solid, pour order 72): 77.343,74.422 80.636,74.422 cw(c80.636,72.56) 81.952,73.877 87.503,68.326 85.217,68.326 83.693,69.85 81.03,72.513 ccw(c79.794,71.278) 79.794,73.025 77.216,73.025
12V_CONN on Bottom_6 "NONET_L04_P-001" (solid, pour order 69): 83.693,69.85 87.503,69.85 87.503,66.294 83.693,66.294
12V_CONN on Bottom_6 "12V_CONN_L06_P004" (solid, pour order 4): 74.813,68.712 74.813,69.231 cw(c75.827,69.231) 75.171,70.004 75.407,70.204 75.407,72.997 74.657,72.997 73.961,73.693 73.961,74.073 cw(c74.31,74.073) 74.31,74.422 77.694,74.422 77.69,72.997 75.74,72.997 75.74,69.639 cw(c74.813,69.639)
5V on Bottom_6 "5V_L06_P036" (solid, pour order 36): 60.969,67.157 61.727,67.157 cw(c61.727,66.703) 62.181,66.703 62.181,64.988 ccw(c62.45,64.988) 62.45,64.719 62.818,64.719 cw(c62.818,64.543) 62.994,64.543 62.994,64.074 cw(c62.827,64.073) 62.827,63.906 60.731,63.906 cw(c60.731,64.084) 60.554,64.084 60.554,64.541 cw(c60.731,64.541) 60.731,64.719 61.474,64.719 ccw(c61.474,64.974) 61.729,64.974 61.729,66.589 ccw(c61.646,66.589) 61.646,66.672 60.984,66.672 60.969,66.687
GND on Bottom_6 "full" (solid, remove dead copper, pour order 23): 60.446,70.622 60.446,71.397 59.371,71.397 57.358,71.397 cw(c57.358,71.499) 57.256,71.499 57.256,71.835 ccw(c57.144,71.835) 57.144,71.947 56.309,71.947 cw(c56.309,72.11) 56.146,72.11 ccw(c55.89,72.11) 55.89,72.366 54.321,72.366 ccw(c54.321,72.035) 53.99,72.035 53.99,70.003 ccw(c54.374,70.003) 54.374,69.618 55.888,69.618 ccw(c55.888,69.876) 56.146,69.876 cw(c56.32,69.876) 56.32,70.051 57.144,70.051 ccw(c57.144,70.162) 57.256,70.162 57.256,70.512 cw(c57.366,70.512) 57.366,70.622
NetL4_1 on Bottom_6 "full" (solid, remove dead copper, pour order 50): 58.318,76.911 58.318,74.827 cw(c58.159,74.827) 58.159,74.668 56.706,74.668 56.706,77.068 58.161,77.068 cw(c58.161,76.911)
NetL1_1 on Bottom_6 "full" (solid, remove dead copper, pour order 49): 64.528,74.825 64.528,76.909 cw(c64.686,76.909) 64.686,77.068 66.14,77.068 66.14,74.668 64.684,74.668 cw(c64.684,74.825)
NetL2_1 on Bottom_6 "full" (solid, remove dead copper, pour order 47): 64.528,65.075 64.528,67.159 cw(c64.686,67.159) 64.686,67.318 66.14,67.318 66.14,64.918 64.684,64.918 cw(c64.684,65.075)
NetL3_1 on Bottom_6 "full" (solid, remove dead copper, pour order 45): 58.318,67.161 58.318,65.077 cw(c58.159,65.077) 58.159,64.918 56.706,64.918 56.706,67.318 58.161,67.318 cw(c58.161,67.161)
NetL2_1 on Bottom_6 "full" (solid, remove dead copper, pour order 42): 63.891,70.389 65.059,70.389 cw(c65.059,70.232) 65.216,70.232 65.216,69.672 cw(c65.087,69.672) 65.087,69.543 64.978,69.543 cw(c64.978,69.694) 64.872,69.587 64.418,70.041 ccw(c64.293,69.917) 64.293,70.093 63.891,70.093
NetL4_1 on Bottom_6 "full" (solid, remove dead copper, pour order 41): 58.821,71.598 57.653,71.598 cw(c57.653,71.755) 57.496,71.755 57.496,72.315 cw(c57.624,72.315) 57.624,72.443 57.733,72.443 cw(c57.733,72.292) 57.84,72.399 58.294,71.945 ccw(c58.419,72.07) 58.419,71.893 58.821,71.893
NetL1_1 on Bottom_6 "full" (solid, remove dead copper, pour order 40): 63.891,71.598 65.059,71.598 ccw(c65.059,71.755) 65.216,71.755 65.216,72.315 ccw(c65.087,72.315) 65.087,72.443 64.978,72.443 ccw(c64.978,72.292) 64.872,72.399 64.418,71.945 cw(c64.293,72.07) 64.293,71.893 63.891,71.893
NetL3_1 on Bottom_6 "full" (solid, remove dead copper, pour order 39): 58.821,70.389 57.653,70.389 ccw(c57.653,70.232) 57.496,70.232 57.496,69.672 ccw(c57.624,69.672) 57.624,69.543 57.733,69.543 ccw(c57.733,69.694) 57.84,69.587 58.294,70.041 cw(c58.419,69.917) 58.419,70.093 58.821,70.093
5V on Bottom_6 "5V_L06_P038" (solid, pour order 38): 66.08,72.39 66.08,72.771 cw(c66.182,72.771) 66.182,72.873 66.385,72.873 ccw(c66.385,73.011) 66.523,73.011 66.523,73.395 ccw(c66.385,73.395) 66.385,73.533 65.166,73.533 ccw(c65.166,73.406) 65.039,73.406 65.039,72.974 ccw(c65.14,72.974) 65.14,72.873 65.369,72.873 cw(c65.369,72.771) 65.47,72.771 65.47,72.39 ccw(c65.572,72.39) 65.572,72.289 65.978,72.289 ccw(c65.978,72.39)
5V on Bottom_6 "5V_L06_P037" (solid, pour order 37): 65.47,69.596 65.47,69.215 cw(c65.369,69.215) 65.369,69.114 65.166,69.114 ccw(c65.166,68.976) 65.028,68.976 65.028,68.591 ccw(c65.166,68.591) 65.166,68.453 66.385,68.453 ccw(c66.385,68.58) 66.512,68.58 66.512,69.012 ccw(c66.41,69.012) 66.41,69.114 66.182,69.114 cw(c66.182,69.215) 66.08,69.215 66.08,69.596 ccw(c65.978,69.596) 65.978,69.698 65.572,69.698 ccw(c65.572,69.596)
DCDC3 on Bottom_6 "DCDC3_L06_P030" (solid, pour order 30): 54.706,68.67 54.704,61.228 55.291,61.224 55.291,62.566 cw(c55.412,62.566) 55.412,62.687 55.885,62.687 cw(c55.885,62.582) 55.991,62.582 55.991,61.224 56.491,61.224 56.48,63.398 ccw(c56.224,63.397) 56.224,63.653 55.925,63.653 cw(c55.925,63.808) 55.77,63.808 55.77,68.623 ccw(c55.553,68.623) 55.553,68.841 54.877,68.841 ccw(c54.877,68.67)
DCDC1 on Bottom_6 "full" (solid, remove dead copper, pour order 29): 68.852,73.437 68.852,76.909 ccw(c68.693,76.91) 68.693,77.068 67.24,77.068 ccw(c67.24,76.823) 66.994,76.823 66.994,73.427 ccw(c67.227,73.427) 67.227,73.194 68.608,73.194 ccw(c68.608,73.437)
DCDC4 on Bottom_6 "full" (solid, pour order 31): 53.994,73.437 53.993,76.909 cw(c54.152,76.91) 54.152,77.068 55.606,77.068 cw(c55.606,76.823) 55.851,76.823 55.851,73.427 cw(c55.618,73.427) 55.618,73.194 54.237,73.194 cw(c54.237,73.437)
VDDIODDR on Bottom_6 "L6 BOT-VDD_3V3" (solid, pour order 32): 67.922,56.998 66.832,56.998 ccw(c66.831,56.956) 66.831,56.998 66.508,56.998 cw(c66.508,57.139) 66.367,57.139 66.366,59.224 66.855,59.224 66.855,58.025 ccw(c66.916,58.025) 66.916,57.963 67.484,57.963 ccw(c67.484,58.034) 67.555,58.034 67.555,59.224 68.049,59.224 68.061,57.137 cw(c67.922,57.136)
DCDC2 on Bottom_6 "DCDC2_L06_P028" (solid, pour order 28): 68.132,68.67 68.134,61.228 67.548,61.224 67.548,62.566 ccw(c67.426,62.566) 67.426,62.687 66.953,62.687 ccw(c66.953,62.582) 66.848,62.582 66.848,61.224 66.348,61.224 66.358,63.398 cw(c66.614,63.397) 66.614,63.653 66.913,63.653 ccw(c66.913,63.808) 67.068,63.808 67.068,68.623 cw(c67.286,68.623) 67.286,68.841 67.962,68.841 cw(c67.962,68.67)
GND on Bottom_6 "full" (solid, pour order 24): 62.281,71.368 62.281,70.593 63.356,70.593 65.345,70.593 cw(c65.345,70.458) 65.481,70.458 65.481,70.177 ccw(c65.614,70.177) 65.614,70.043 66.496,70.043 cw(c66.496,69.958) 66.581,69.958 66.581,69.799 ccw(c66.762,69.799) 66.762,69.618 68.337,69.618 ccw(c68.337,69.886) 68.606,69.887 68.606,72.143 ccw(c68.381,72.143) 68.381,72.368 66.75,72.368 ccw(c66.75,72.199) 66.581,72.199 66.581,72.07 cw(c66.479,72.07) 66.479,71.968 65.591,71.968 ccw(c65.591,71.858) 65.481,71.858 65.481,71.529 cw(c65.32,71.529) 65.32,71.368
5V on Bottom_6 "5V_L06_P034" (solid, pour order 34): 56.657,72.39 56.657,72.771 ccw(c56.555,72.771) 56.555,72.873 56.352,72.873 cw(c56.352,73.011) 56.214,73.011 56.214,73.395 cw(c56.352,73.395) 56.352,73.533 57.571,73.533 cw(c57.571,73.406) 57.698,73.406 57.698,72.974 cw(c57.597,72.974) 57.596,72.873 57.368,72.873 ccw(c57.368,72.771) 57.266,72.771 57.266,72.39 cw(c57.165,72.39) 57.165,72.289 56.758,72.289 cw(c56.758,72.39)
5V on Bottom_6 "5V_L06_P035" (solid, pour order 35): 56.657,69.596 56.657,69.215 cw(c56.555,69.215) 56.555,69.114 56.352,69.114 ccw(c56.352,68.976) 56.214,68.976 56.214,68.591 ccw(c56.352,68.591) 56.352,68.453 57.571,68.453 ccw(c57.571,68.58) 57.698,68.58 57.698,69.012 ccw(c57.597,69.012) 57.596,69.114 57.368,69.114 cw(c57.368,69.215) 57.266,69.215 57.266,69.596 ccw(c57.165,69.596) 57.165,69.698 56.758,69.698 ccw(c56.758,69.596)
12V on Bottom_6 "12V_L06_P003" (solid, pour order 3): 71.859,65.482 75.727,65.482 ccw(c75.727,65.992) 76.237,65.992 76.237,72.872 75.898,72.872 75.898,69.643 cw(c74.809,69.642) 74.809,68.554 71.83,68.554 ccw(c71.83,68.113) 71.389,68.113 71.389,65.952 ccw(c71.859,65.952)
VDDCORE on PWR_4 "PWR_4-VDDCORE" (solid, pour order 94): 44.053,44.135 57.277,44.135 57.277,46.185 51.601,46.185 51.601,50.71 41.376,50.71 41.376,46.935 40.026,46.935 40.026,45.885 38.851,44.71 37.176,44.71 37.176,41.01 37.076,40.91 36.551,40.91 36.551,38.06 40.201,38.06 40.201,38.26 38.651,39.558 38.651,39.801 38.882,40.029 39.326,39.624 40.251,39.624 40.251,42.11 41.026,42.11 41.026,43.688 43.605,43.688
3V3 on PWR_4 "3V3" (solid, remove dead copper, pour order 97): 0,12.33 cw(c0.8,12.33) 0.8,13.13 1,13.13 ccw(c1,13.93) 1.8,13.93 1.8,77.35 ccw(c1,77.35) 1,78.15 0.8,78.15 cw(c0.8,78.95) 0,78.95 0,86.8 cw(c3.2,86.8) 3.193,90 3.175,90 19.989,90 cw(c19.989,89.2) 20.789,89.2 ccw(c21.589,89.2) 21.589,88.4 21.59,88.399 42.015,88.4 71.399,88.4 71.389,88.4 ccw(c71.389,89.2) 72.189,89.2 cw(c72.989,89.2) 72.989,90 89.789,90 89.807,90 cw(c89.8,86.8) 93,86.807 93,77.307 cw(c92.2,77.307) 92.2,76.507 ccw(c92.2,75.707) 91.4,75.707 91.4,14.8 ccw(c92.2,14.8) 92.2,14 cw(c92.2,13.2) 93,13.2 93,3.2 cw(c89.8,3.2) 89.8,0 73,0 cw(c73,0.8) 72.2,0.8 ccw(c71.4,0.8) 71.4,1.6 71.399,1.6 50.975,1.6 21.59,1.6 21.6,1.6 ccw(c21.6,0.8) 20.8,0.8 cw(c20,0.8) 20,0 3.2,0 cw(c3.2,3.2) 0,3.2
VDDCORE on PWR_4 "NONET_L04_P-001" (solid, pour order 93): 54.737,44.132 54.737,59.055 57.277,59.055 57.277,44.132
VDDCPU on PWR_4 "NONET_L04_P-001" (solid, pour order 91): 52.324,59.055 52.324,47.092 54.61,47.092 54.61,59.055
VDDIODDR on PWR_4 "NONET_L04_P-001" (solid, pour order 90): 65.913,58.12 65.913,43.815 65.659,43.561 64.643,43.561 64.643,38.1 68.199,41.656 68.199,58.12
5V on PWR_4 "PWR_4-5V 1" (solid, pour order 89): 60.579,62.611 72.263,62.611 72.263,59.69 76.462,55.491 77.47,56.642 75.057,59.055 75.057,63.119 73.787,64.389 60.579,64.389
5V on PWR_4 "NONET_L04_P-001" (solid, pour order 86): 74.93,10.922 73.66,10.922 73.66,9.525 78.028,9.525 78.028,23.578 72.136,29.47 72.136,49.276 78.486,55.626 78.486,60.325 77.724,60.325 77.724,57.404 70.434,50.114 70.434,28.398 74.93,23.903
12V on PWR_4 "NONET_L04_P-001" (solid, pour order 85): 75.544,68.961 78.656,68.961 ccw(c78.74,69.088) 78.74,68.936 79.527,68.936 81.788,66.675 81.788,64.469 81.915,64.342 81.915,54.483 77.561,50.129 77.561,46.391 82.423,41.529 82.423,35.179 79.756,32.512 76.2,32.512 75.819,32.893 75.819,34.417 76.2,34.798 78.486,34.798 79.883,36.195 79.883,40.005 74.803,45.085 74.803,51.308 78.613,55.118 78.613,64.008 77.216,65.405 74.803,65.405
12V on PWR_4 "NONET_L04_P-001" (solid, pour order 84): 70.612,73.914 70.612,66.675 71.882,65.405 76.2,65.405 76.2,68.961 72.771,68.961 72.771,73.914
VDDOUT25 on PWR_4 "VDD-2V5" (solid, remove dead copper, pour order 81): 45.974,46.657 44.326,45.009 44.326,44.069 43.856,43.599 41.126,43.599 41.126,41.952 40.351,41.952 40.351,39.624 39.213,39.624 38.976,39.86 38.876,39.86 38.776,39.76 38.776,39.53 39.861,38.436 39.861,37.41 41.726,37.41 42.976,37.41 42.977,42.56 44.179,42.56 45.279,43.66 46.751,43.66 46.751,44.303 48.351,45.903 48.351,47.879 46.482,47.879 45.974,47.371
VDDIODDR on PWR_4 "VDDIODDR_L04_P083" (solid, remove dead copper, pour order 83): 64.876,43.56 45.024,43.56 43.924,42.46 42.312,42.46 41.651,41.82 41.651,40.71 43.076,40.71 43.076,39.26 43.076,18.86 64.876,18.86
VDDCPU on PWR_4 "VDDCPU_L04_P080" (solid, remove dead copper, pour order 80): 54.61,52.585 54.61,46.361 51.701,46.361 51.701,50.86 41.301,50.86 41.301,49.784 38.277,49.784 38.277,47.879 38.983,47.879 39.001,47.86 39.001,46.584 39.001,46.11 38.702,45.811 36.126,45.811 36.126,52.585
12V_CONN on PWR_4 "NONET_L04_P-001" (solid, pour order 70): 85.471,69.85 87.503,69.85 87.503,17.526 85.471,17.526
5V on PWR_4 "PWR_4-5V" (solid, pour order 68): 55.658,68.428 57.553,68.428 ccw(c57.553,68.533) 57.658,68.533 57.658,69.075 ccw(c57.548,69.075) 57.548,69.185 56.786,69.185 cw(c56.785,69.792) 56.179,69.792 56.179,72.219 cw(c56.771,72.219) 56.776,72.812 57.75,72.805 57.75,77.191 64.946,77.191 64.946,72.83 65.942,72.837 cw(c65.946,72.265) 66.518,72.265 66.518,69.856 cw(c65.872,69.856) 65.872,69.21 65.049,69.21 65.049,64.872 60.795,64.872 ccw(c60.795,64.633) 60.556,64.633 60.556,64.054 ccw(c60.824,64.054) 60.824,63.787 65.591,63.787 ccw(c65.591,64.287) 66.091,64.287 66.091,68.06 cw(c66.382,68.06) 66.382,68.351 67.031,68.351 ccw(c67.031,68.668) 67.347,68.668 67.347,73.681 ccw(c66.987,73.681) 66.987,74.041 66.823,74.041 cw(c66.823,74.469) 66.396,74.469 66.396,78.45 ccw(c65.928,78.45) 65.928,78.918 56.947,78.918 ccw(c56.947,78.334) 56.363,78.334 56.363,74.371 cw(c56.032,74.371) 56.032,74.041 55.74,74.041 ccw(c55.74,73.65) 55.349,73.65 55.349,68.737 ccw(c55.658,68.736)
NetL3_1 on PWR_4 "full" (solid, remove dead copper, pour order 65): 58.331,70.491 57.541,70.491 ccw(c57.541,70.34) 57.39,70.34 57.39,69.541 ccw(c57.558,69.541) 57.506,69.382 cw(c57.39,69.025) 57.765,69.025 57.765,67.666 cw(c57.515,67.666) 57.625,67.441 ccw(c57.711,67.266) 57.515,67.266 57.515,65.084 ccw(c57.733,65.084) 57.733,64.866 58.342,64.866 ccw(c58.342,65.065) 58.54,65.065 58.54,69.641 58.54,70.282 ccw(c58.331,70.282)
NetL4_1 on PWR_4 "full" (solid, remove dead copper, pour order 64): 58.331,71.48 57.541,71.48 cw(c57.541,71.631) 57.39,71.631 57.39,72.43 cw(c57.558,72.43) 57.506,72.59 ccw(c57.39,72.946) 57.765,72.946 57.765,74.305 ccw(c57.515,74.305) 57.625,74.53 cw(c57.711,74.705) 57.515,74.705 57.515,76.887 cw(c57.733,76.887) 57.733,77.105 58.342,77.105 cw(c58.342,76.906) 58.54,76.906 58.54,72.33 58.54,71.689 cw(c58.331,71.689)
NetL2_1 on PWR_4 "full" (solid, remove dead copper, pour order 63): 64.401,70.489 65.191,70.489 cw(c65.191,70.338) 65.342,70.338 65.342,69.539 cw(c65.174,69.539) 65.226,69.379 ccw(c65.342,69.023) 64.967,69.023 64.967,67.664 ccw(c65.217,67.664) 65.107,67.439 cw(c65.022,67.264) 65.217,67.264 65.217,65.082 cw(c64.999,65.082) 64.999,64.864 64.391,64.864 cw(c64.391,65.063) 64.192,65.063 64.192,69.639 64.192,70.28 cw(c64.401,70.28)
NetL1_1 on PWR_4 "full" (solid, remove dead copper, pour order 62): 64.39,71.49 65.18,71.49 ccw(c65.18,71.641) 65.331,71.641 65.331,72.439 ccw(c65.163,72.439) 65.215,72.599 cw(c65.331,72.956) 64.956,72.956 64.956,74.315 cw(c65.206,74.315) 65.096,74.539 ccw(c65.01,74.715) 65.206,74.715 65.206,76.897 ccw(c64.988,76.897) 64.988,77.115 64.379,77.115 ccw(c64.379,76.916) 64.181,76.916 64.181,72.34 64.181,71.699 ccw(c64.39,71.699)
GND on GND_2 "GND_L02_P073" (solid, remove dead copper, pour order 73): 0,12.33 cw(c0.8,12.33) 0.8,13.13 1,13.13 ccw(c1,13.93) 1.8,13.93 1.8,77.35 ccw(c1,77.35) 1,78.15 0.8,78.15 cw(c0.8,78.95) 0,78.95 0,86.8 cw(c3.2,86.8) 3.193,90 3.175,90 19.989,90 cw(c19.989,89.2) 20.789,89.2 ccw(c21.589,89.2) 21.589,88.4 21.59,88.399 42.015,88.4 71.399,88.4 71.389,88.4 ccw(c71.389,89.2) 72.189,89.2 cw(c72.989,89.2) 72.989,90 89.789,90 89.807,90 cw(c89.8,86.8) 93,86.807 93,77.307 cw(c92.2,77.307) 92.2,76.507 ccw(c92.2,75.707) 91.4,75.707 91.4,14.8 ccw(c92.2,14.8) 92.2,14 cw(c92.2,13.2) 93,13.2 93,3.2 cw(c89.8,3.2) 89.8,0 73,0 cw(c73,0.8) 72.2,0.8 ccw(c71.4,0.8) 71.4,1.6 71.399,1.6 50.975,1.6 21.59,1.6 21.6,1.6 ccw(c21.6,0.8) 20.8,0.8 cw(c20,0.8) 20,0 3.2,0 cw(c3.2,3.2) 0,3.2
VDDCORE on SIGNAL_3 "NONET_L04_P-001" (solid, pour order 95): 44.831,41.91 44.831,46.609 39.497,46.609 39.497,41.91
3V3 on SIGNAL_3 "NONET_L04_P-001" (solid, remove dead copper, pour order 98): 46.99,49.657 37.465,49.657 36.068,48.26 36.068,45.212 36.068,40.386 37.211,39.243 47.244,39.243 48.097,40.096 48.097,48.55

## Keep-outs
Keep-Out Layer:
  lines w0.2: 1.8,77.35 1.8,13.93 cw(c1,13.93) 1,13.13 0.8,13.13 ccw(c0.8,12.33) 0,12.33 0,3.2 ccw(c3.2,3.2) 3.2,0 19.99,0 ; 1.8,77.35 ccw(c1,77.35) 1,78.15 0.8,78.15 cw(c0.8,78.95) 0,78.95 0,86.8 cw(c3.2,86.8) 3.193,90 ; 3.175,90 19.964,90 ; 19.989,90 cw(c19.989,89.2) 20.789,89.2 ccw(c21.589,89.2) 21.589,88.4 ; 20,0 ccw(c20,0.8) 20.8,0.8 cw(c21.6,0.8) 21.6,1.6 ; 21.59,1.6 50.975,1.6 71.399,1.6 cw(c71.4,0.8) 72.2,0.8 ccw(c73,0.8) 73,0 ; 21.59,88.399 42.015,88.4 71.399,88.4 ; 71.389,88.4 ccw(c71.389,89.2) 72.189,89.2 cw(c72.989,89.2) 72.989,90 ; 73,90 89.789,90 ; 73.025,0 89.815,0 ; 89.8,0 ccw(c89.8,3.2) 93,3.2 93,13.2 ccw(c92.2,13.2) 92.2,14 cw(c92.2,14.8) 91.4,14.8 ; 89.807,90 cw(c89.8,86.8) 93,86.807 93,77.307 cw(c92.2,77.307) 92.2,76.507 ccw(c92.2,75.707) 91.4,75.707 ; 91.4,14.8 91.4,75.707

## Other copper
Top_1:
  rectangle net 5V: 73.902,10.189 74.303,10.858
  rectangle net 5V: 74.936,10.19 75.336,10.858
  rectangle net 5V: 75.969,10.19 76.37,10.858
  rectangle net 5V: 77.003,10.19 77.403,10.858
  pour cut-out: 24.765,80.645 24.765,76.826 24.761,76.822 25.803,76.822 25.803,73.069 35.411,73.069 35.411,78.615 36.453,78.615 36.453,80.641 36.449,80.645
Bottom_6:
  rectangle net 5V: 77.003,10.19 77.403,11.034
  rectangle net 5V: 74.936,10.19 75.336,11.034
  rectangle net 5V: 75.969,10.19 76.37,11.034
  rectangle net 5V: 73.902,10.189 74.303,11.034
  rectangle net GND: 72.417,22.341 72.818,23.186
  rectangle net GND: 73.357,22.367 73.757,23.211
  rectangle net GND: 73.357,20.628 73.757,21.472
  rectangle net GND: 72.417,20.653 72.818,21.498